# Altium PCB 核心板.PcbDoc (part 2 of 3)
Units mm, origin at the board's own origin, x right, y up, seen from the top; angles counter-clockwise.
Board outline 93.66 x 72.54 mm, 2 copper layers (Top Layer, Bottom Layer); 96 components, 149 nets, 537 pads, 213 vias.
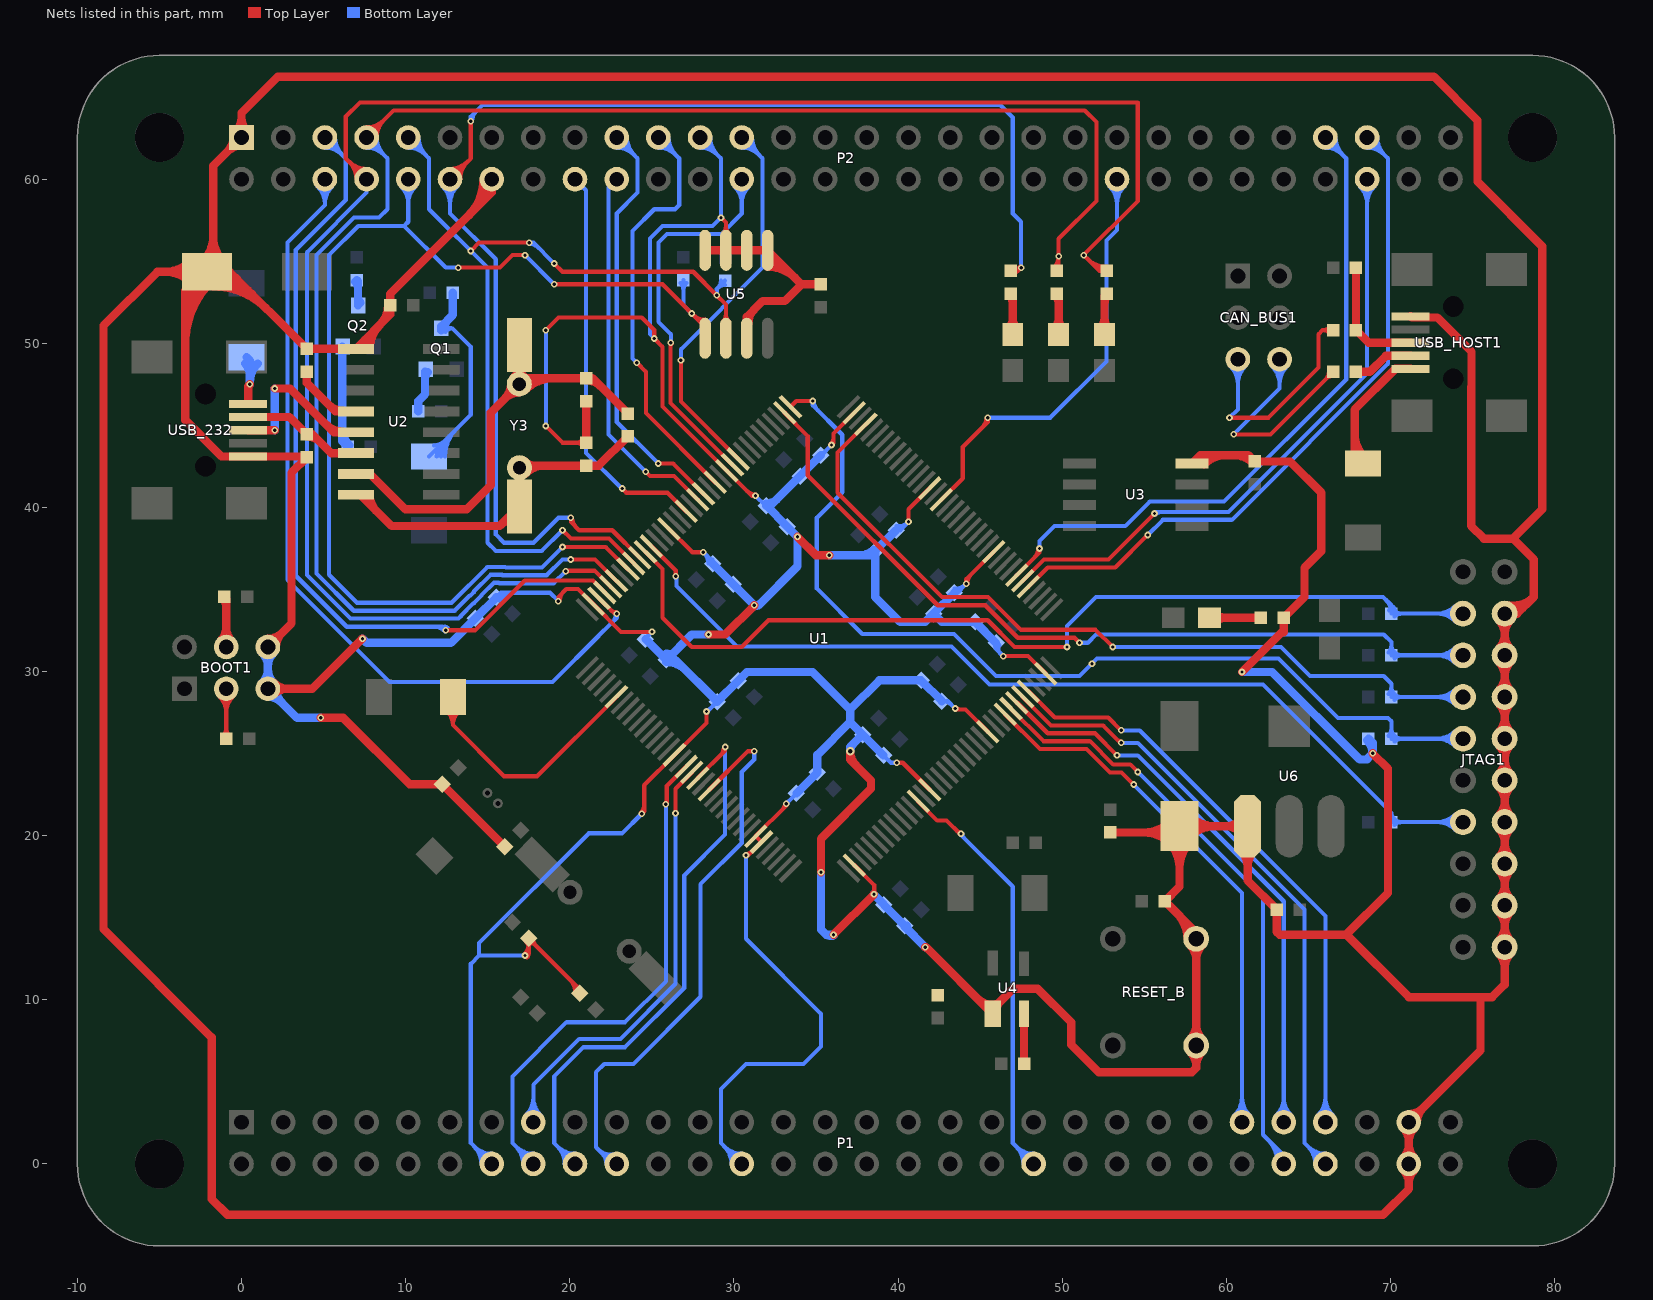
[diagram p2: the nets of this part, all layers, seen from the top]

## Via types
v1: diameter 0.406, hole 0.203, Top Layer to Bottom Layer, 212 vias
v2: diameter 0.508, hole 0.254, Top Layer to Bottom Layer, 1 vias

## Nets (pads, with @x,y where several pads share a name; then routed paths per layer and width w, separated by ;. In a path a pad name is that pad's centre, name@x,y a point inside that pad or via, vN(x,y) a via of type N, cw(c..) or ccw(c..) an arc to the next point about the centre after c; other vN are vias at no path point) (continued)
FSMC_D8: P1.49 U1.64 | length 36.7
  Top Layer w0.254: U1.64@46.531,27.392 48.65,25.273 51.486,25.273 52.909,23.851 53.619,23.851 v1(54.356,23.114)
  Bottom Layer w0.254: v1(54.356,23.114) 60.96,16.51 P1.49@60.96,2.54 ; P1.49@60.519,2.981 ccw(c59.456,4.044) 60.96,4.044 ccw(c62.464,4.044) P1.49@61.401,2.981 ; P1.49@60.699,2.801 ccw(c60.069,3.431) 60.96,3.431 ccw(c61.851,3.431) P1.49@61.221,2.801
FSMC_D9: P1.52 U1.65 | length 39.7
  Top Layer w0.254: U1.65@46.885,27.745 46.885,27.728 48.857,25.756 51.686,25.756 53.109,24.333 54.153,24.333 v1(54.61,23.876)
  Bottom Layer w0.254: v1(54.61,23.876) 62.23,16.256 62.23,1.779 63.5,0.509 P1.52@63.5,0 ; 62.51,1.499 cw(c61.012,0) P1.52@63.131,0 ; 62.944,1.065 cw(c61.879,0) P1.52@63.385,0
FSMC_D10: P1.51 U1.66 | length 38.5
  Top Layer w0.254: U1.66@47.238,28.099 47.262,28.099 49.123,26.238 51.994,26.238 v1(53.34,24.892)
  Bottom Layer w0.254: v1(53.34,24.892) 54.61,24.892 63.5,16.002 P1.51@63.5,2.54 ; P1.51@63.059,2.981 ccw(c61.996,4.044) 63.5,4.044 ccw(c65.004,4.044) P1.51@63.941,2.981 ; P1.51@63.239,2.801 ccw(c62.609,3.431) 63.5,3.431 ccw(c64.391,3.431) P1.51@63.761,2.801
FSMC_D11: P1.54 U1.67 | length 42.5
  Top Layer w0.254: U1.67@47.592,28.452 49.323,26.721 52.499,26.721 53.566,25.654 v1(53.594,25.654) ; 53.416,25.804 ccw(c53.594,25.982) v1@53.594,25.73
  Bottom Layer w0.254: v1(53.594,25.654) 54.61,25.654 64.77,15.494 64.77,1.27 P1.54@66.04,0 ; P1.54@65.417,0 ccw(c63.913,0) 64.976,1.064 ccw(c66.04,2.127) P1.54@66.04,0.623 ; P1.54@65.671,0 ccw(c64.78,0) 65.41,0.63 ccw(c66.04,1.26) P1.54@66.04,0.369
FSMC_D12: P1.53 U1.68 | length 40.1
  Top Layer w0.254: U1.68@47.945,28.806 49.548,27.203 52.807,27.203 v1(53.594,26.416)
  Bottom Layer w0.254: v1(53.594,26.416) 54.73,26.416 66.04,15.106 P1.53@66.04,2.54 ; P1.53@65.599,2.981 ccw(c64.536,4.044) 66.04,4.044 ccw(c67.544,4.044) P1.53@66.481,2.981 ; P1.53@65.779,2.801 ccw(c65.149,3.431) 66.04,3.431 ccw(c66.931,3.431) P1.53@66.301,2.801
FSMC_D13: P2.55 U1.77 | length 45.6
  Top Layer w0.254: U1.77@47.945,35.17 49.123,36.347 53.233,36.347 v1(55.208,38.322)
  Bottom Layer w0.254: v1(55.208,38.322) 55.213,38.322 56.134,39.243 60.338,39.243 69.85,48.755 69.85,61.27 P2.55@68.58,62.54 ; P2.55@68.58,61.917 cw(c68.58,60.413) 69.644,61.476 cw(c70.707,62.54) P2.55@69.203,62.54 ; P2.55@68.58,62.171 cw(c68.58,61.28) 69.21,61.91 cw(c69.84,62.54) P2.55@68.949,62.54
FSMC_D14: P2.56 U1.78 | length 42.2
  Top Layer w0.254: U1.78@47.592,35.523 48.898,36.83 52.832,36.83 v1(55.626,39.624)
  Bottom Layer w0.254: v1(55.626,39.624) 55.728,39.726 60.138,39.726 68.58,48.168 P2.56@68.58,60 ; v1@55.68,39.57 cw(c56.055,39.195) 56.055,39.726 ; P2.56@68.139,59.559 cw(c67.076,58.496) 68.58,58.496 cw(c70.084,58.496) P2.56@69.021,59.559 ; P2.56@68.319,59.739 cw(c67.689,59.109) 68.58,59.109 cw(c69.471,59.109) P2.56@68.841,59.739
FSMC_D15: P2.53 U1.79 | length 45.1
  Top Layer w0.254: U1.79@47.238,35.877 48.619,37.258 48.619,37.263 v1(48.619,37.493) ; 48.323,36.961 ccw(c47.791,37.493) v1@48.543,37.493
  Bottom Layer w0.254: v1(48.619,37.493) 48.619,37.475 48.615,37.475 48.615,37.947 49.53,38.862 53.848,38.862 55.34,40.354 59.865,40.354 67.31,47.8 67.31,61.27 P2.53@66.04,62.54 ; P2.53@66.04,61.917 cw(c66.04,60.413) 67.104,61.476 cw(c68.167,62.54) P2.53@66.663,62.54 ; P2.53@66.04,62.171 cw(c66.04,61.28) 66.67,61.91 cw(c67.3,62.54) P2.53@66.409,62.54
FSMC_INT3: P2.44 U1.92 | length 30.6
  Top Layer w0.254: U1.92@42.642,40.473 43.942,41.773 43.942,43.688 45.466,45.212 v1(45.466,45.466) ; 45.156,44.902 ccw(c44.593,45.466) v1@45.39,45.466
  Bottom Layer w0.254: v1(45.466,45.466) 49.276,45.466 52.705,48.895 52.705,56.261 53.34,56.896 P2.44@53.34,60 ; P2.44@52.899,59.559 cw(c51.836,58.496) 53.34,58.496 cw(c54.844,58.496) P2.44@53.781,59.559 ; P2.44@53.079,59.739 cw(c52.449,59.109) 53.34,59.109 cw(c54.231,59.109) P2.44@53.601,59.739
FSMC_INTR: P1.20 U1.22 | length 37.2
  Top Layer w0.254: U1.22@28.5,22.795 30.85,25.146 v1(31.242,25.146)
  Bottom Layer w0.254: 21.717,0.889 ccw(c22.47,1.642) P1.20@22.716,0.606 ; 21.976,0.63 cw(c21.346,0) P1.20@22.237,0 ; 22.039,0.567 ccw(c22.593,1.122) P1.20@22.775,0.359 ; P1.20@22.86,0 22.606,0 21.59,1.016 21.59,5.588 22.098,6.096 23.876,6.096 27.965,10.185 27.965,17.043 30.48,19.558 30.48,23.876 31.242,24.638 v1(31.242,25.146)
FSMC_NBL0: P2.5 U1.141 | length 55
  Top Layer w0.254: v1(12.446,32.512) 14.224,32.512 17.256,35.544 21.408,35.544 U1.141@22.136,34.816
  Bottom Layer w0.254: P2.5@5.08,61.917 cw(c5.08,60.413) 6.144,61.476 cw(c7.207,62.54) P2.5@5.703,62.54 ; P2.5@5.08,62.171 cw(c5.08,61.28) 5.71,61.91 cw(c6.34,62.54) P2.5@5.449,62.54 ; P2.5@5.08,62.54 6.35,61.27 6.35,58.73 3.302,55.682 3.302,35.836 6.41,32.728 12.23,32.728 v1(12.446,32.512) ; 11.741,32.728 cw(c11.741,31.807) v1@12.392,32.458 ; 12.354,32.728 cw(c12.354,32.42) v1@12.572,32.638
FSMC_NBL1: P2.6 U1.142 | length 56
  Top Layer w0.254: U1.142@21.782,34.463 22.717,33.528 v1(22.86,33.528) ; 22.486,33.759 ccw(c22.86,34.133) v1@22.86,33.604
  Bottom Layer w0.254: P2.6@4.639,59.559 cw(c3.576,58.496) 5.08,58.496 cw(c6.584,58.496) P2.6@5.521,59.559 ; P2.6@4.819,59.739 cw(c4.189,59.109) 5.08,59.109 cw(c5.971,59.109) P2.6@5.341,59.739 ; P2.6@5.08,60 5.08,58.42 2.794,56.134 2.794,35.588 9.02,29.362 18.948,29.362 21.768,32.182 21.768,32.202 22.5,32.934 22.52,32.934 22.86,33.274 v1(22.86,33.528) ; 22.647,33.061 ccw(c22.292,33.417) v1@22.785,33.513
FSMC_NE2: P2.19 U1.124 | length 29.2
  Top Layer w0.254: v1(25.4,42.672) 26.301,42.672 U1.124@28.146,40.827
  Bottom Layer w0.254: P2.19@22.86,61.917 cw(c22.86,60.413) 23.924,61.476 cw(c24.987,62.54) P2.19@23.483,62.54 ; P2.19@22.86,62.171 cw(c22.86,61.28) 23.49,61.91 cw(c24.12,62.54) P2.19@23.229,62.54 ; P2.19@22.86,62.54 24.13,61.27 24.13,59.182 22.86,57.912 22.86,45.212 v1(25.4,42.672)
FSMC_NE3: P2.20 U1.125 | length 22.8
  Top Layer w0.254: v1(24.638,42.164) 24.892,41.91 26.356,41.91 U1.125@27.793,40.473
  Bottom Layer w0.254: P2.20@22.86,60 22.352,59.492 22.352,44.45 v1(24.638,42.164)
FSMC_NE4: P2.18 U1.127 | length 24.7
  Top Layer w0.254: v1(23.19,41.148) 23.444,40.894 25.958,40.894 U1.127@27.086,39.766
  Bottom Layer w0.254: P2.18@20.32,60 20.998,59.322 20.998,43.315 23.165,41.148 v1(23.19,41.148) ; 23.017,41.296 ccw(c23.19,41.469) v1@23.19,41.224
FSMC_NIORD: P1.16 U1.18 | length 35.3
  Top Layer w0.254: v1@25.803,21.965 ccw(c25.551,22.217) 25.908,22.217 ; v1(25.857,21.911) 25.889,21.911 25.908,21.93 25.908,23.032 U1.18@27.086,24.21
  Bottom Layer w0.254: P1.16@17.157,0 ccw(c15.653,0) 16.716,1.064 ccw(c17.78,2.127) P1.16@17.78,0.623 ; P1.16@17.411,0 ccw(c16.52,0) 17.15,0.63 ccw(c17.78,1.26) P1.16@17.78,0.369 ; P1.16@17.78,0 16.51,1.27 16.51,5.334 19.812,8.636 23.368,8.636 25.857,11.125 v1(25.857,21.911)
FSMC_NIOS16: P1.40 U1.49 | length 29.7
  Top Layer w0.254: U1.49@41.228,22.088 42.386,20.93 42.951,20.93 43.764,20.117 v1(43.84,20.117) ; 43.58,20.301 ccw(c43.84,20.561) v1@43.84,20.193
  Bottom Layer w0.254: v1(43.84,20.117) 43.84,20.04 46.99,16.891 46.99,1.27 P1.40@48.26,0 ; v1@43.917,20.117 ccw(c44.285,20.117) 44.025,19.856 ; P1.40@47.637,0 ccw(c46.133,0) 47.196,1.064 ccw(c48.26,2.127) P1.40@48.26,0.623 ; P1.40@47.891,0 ccw(c47,0) 47.63,0.63 ccw(c48.26,1.26) P1.40@48.26,0.369
FSMC_NIOWR: P1.18 U1.20 | length 38.7
  Top Layer w0.254: U1.20@27.793,23.503 29.464,25.174 v1(29.464,25.4) ; 29.174,24.884 ccw(c28.658,25.4) v1@29.388,25.4
  Bottom Layer w0.254: P1.18@19.697,0 ccw(c18.193,0) 19.256,1.064 ccw(c20.32,2.127) P1.18@20.32,0.623 ; P1.18@19.951,0 ccw(c19.06,0) 19.69,0.63 ccw(c20.32,1.26) P1.18@20.32,0.369 ; P1.18@20.32,0 19.05,1.27 19.05,5.334 20.828,7.112 23.368,7.112 26.973,10.717 26.973,17.575 29.464,20.066 v1(29.464,25.4)
FSMC_NOE: P2.25 U1.118 | length 27.4
  Top Layer w0.254: v1(26.772,48.971) 26.772,46.444 U1.118@30.268,42.948
  Bottom Layer w0.254: v1(26.772,48.971) 26.772,49.632 31.75,54.61 31.75,61.27 P2.25@30.48,62.54 ; P2.25@30.48,61.917 cw(c30.48,60.413) 31.544,61.476 cw(c32.607,62.54) P2.25@31.103,62.54 ; P2.25@30.48,62.171 cw(c30.48,61.28) 31.11,61.91 cw(c31.74,62.54) P2.25@30.849,62.54
FSMC_NREG: P1.15 U1.19 | length 30.6
  Top Layer w0.254: v1(26.443,21.363) 26.443,22.86 U1.19@27.439,23.856
  Bottom Layer w0.254: P1.15@17.339,2.981 ccw(c16.276,4.044) 17.78,4.044 ccw(c19.284,4.044) P1.15@18.221,2.981 ; P1.15@17.519,2.801 ccw(c16.889,3.431) 17.78,3.431 ccw(c18.671,3.431) P1.15@18.041,2.801 ; P1.15@17.78,2.54 17.78,4.826 20.574,7.62 23.089,7.62 26.443,10.974 v1(26.443,21.363)
FSMC_NWAIT: P2.21 U1.122 | length 29.3
  Top Layer w0.254: v1(24.079,48.819) 24.638,48.26 24.638,45.749 U1.122@28.853,41.534
  Bottom Layer w0.254: v1(24.079,48.819) 23.825,49.073 23.825,56.845 25.146,58.166 26.416,58.166 26.67,58.42 26.67,61.27 P2.21@25.4,62.54 ; P2.21@25.4,61.917 cw(c25.4,60.413) 26.464,61.476 cw(c27.527,62.54) P2.21@26.023,62.54 ; P2.21@25.4,62.171 cw(c25.4,61.28) 26.03,61.91 cw(c26.66,62.54) P2.21@25.769,62.54
FSMC_NWE: P2.26 U1.119 | length 27.3
  Top Layer w0.254: 26.14,49.8 cw(c26.4,49.8) v1@26.216,49.984 ; v1(26.162,50.038) 26.14,50.016 26.14,46.369 U1.119@29.914,42.594
  Bottom Layer w0.254: v1(26.162,50.038) 26.162,50.546 25.4,51.308 25.4,56.134 25.933,56.667 29.235,56.667 30.48,57.912 P2.26@30.48,60 ; P2.26@30.039,59.559 cw(c28.976,58.496) 30.48,58.496 cw(c31.984,58.496) P2.26@30.921,59.559 ; P2.26@30.219,59.739 cw(c29.589,59.109) 30.48,59.109 cw(c31.371,59.109) P2.26@30.741,59.739
GND: BOOT1.5 BOOT1.6 C1.2 C2.2 C3.1 C4.2 C5.2 C6.1 C7.1 C8.2 C9.2 C10.2 C11.2 C12.1 C13.1 C14.1 C15.1 C16.1 C17.1 C18.1 C19.1 C20.1 C21.1 C22.1 C23.1 C24.1 C25.1 C26.1 C27.2 C28.2 C29.2 C30.2 C31.2 C32.2 C33.2 C34.2 C35.2 C36.1 C37.2 C38.2 C39.2 CT1.2 CT2.2 JTAG1.4 JTAG1.6 JTAG1.8 JTAG1.10 JTAG1.12 JTAG1.14 JTAG1.16 JTAG1.18 JTAG1.20 P1.14 P1.26 P1.57 P1.58 P2.1 P2.14 P2.23 R6.1 R11.2 R16.1 RESET_B.1 U1.16 U1.30 U1.31 U1.38 U1.51 U1.61 U1.71 U1.83 U1.94 U1.107 U1.120 U1.130 U1.143 U2.1 U3.4 U4.1 U5.1 U5.2 U5.3 U5.4 U5.7 U6.1 USB_232.5 USB_HOST1.5 | length 957.8
  Top Layer w0.254: v1@17.218,12.754 ccw(c16.543,13.429) C5.2@17.498,13.429 ; v1(17.272,12.7) 17.498,12.926 C5.2@17.498,13.744 20.602,10.64 C4.2@20.602,10.386 ccw(c19.989,10.386) 20.423,10.819 ; C5.2@17.318,13.565 cw(c16.885,13.131) 17.498,13.131 cw(c18.111,13.131) C5.2@17.677,13.565 ; v1@17.398,12.574 ccw(c17.156,12.816) 17.498,12.816 ; C5.2@17.498,13.49 cw(c17.498,12.877) 17.931,13.311 cw(c18.365,13.744) C5.2@17.752,13.744 ; v1(18.542,44.958) 19.558,43.942 C24.1@20.998,43.942 ; v1(18.542,50.8) 19.304,51.562 24.384,51.562 25.146,50.8 v1(25.146,50.292) 25.654,49.784 25.654,46.147 U1.120@29.56,42.241 31.097,40.705 v1(31.319,40.705) ; v1(19.304,34.29) 19.304,34.544 19.787,35.027 20.243,35.027 20.25,35.033 20.505,35.033 U1.143@21.429,34.109 23.12,32.418 v1(25.014,32.418) ; v1@19.38,34.29 cw(c20.177,34.29) 19.614,34.854 ; 19.989,11.253 cw(c19.122,10.386) C4.2@20.348,10.386 ; C24.1@20.818,43.762 ccw(c20.385,43.329) 20.385,43.942 ccw(c20.385,44.555) C24.1@20.818,44.122 ; v1@24.33,21.39 ccw(c23.832,21.888) 24.536,21.888 ; v1(24.384,21.336) 24.536,21.488 24.536,23.075 U1.16@26.378,24.917 28.33,26.868 v1(28.33,27.563) ; U1.130@26.025,38.705 27.46,37.27 v1(28.139,37.27) ; v1(29.21,57.658) 29.515,57.353 U5.3@29.515,55.663 ; U5.3@29.357,56.721 ccw(c28.976,57.101) 29.515,57.101 ccw(c30.053,57.101) U5.3@29.672,56.721 ; v1(30.734,18.796) 30.864,18.796 U1.31@31.682,19.613 U1.30@31.328,19.967 33.194,21.833 v1(33.194,21.937) ; v1@30.734,18.872 ccw(c30.734,19.371) U1.31@31.087,19.018 ; 30.809,40.992 ccw(c31.319,41.503) v1@31.319,40.781 ; 32.99,21.629 ccw(c32.681,21.937) v1@33.118,21.937 ; v1@35.891,43.852 ccw(c35.463,44.28) 36.068,44.28 ; v1(35.945,43.799) 36.068,43.922 36.068,44.506 U1.107@37.339,45.776 ; U1.38@37.316,18.199 U1.38@37.339,18.199 38.546,16.992 38.546,16.436 v1(38.531,16.42) ; v1@38.477,16.474 ccw(c38.31,16.641) 38.546,16.641 ; v1(39.924,24.443) 40.287,24.443 U1.51@41.935,22.795 ; v1(40.64,39.116) 40.64,39.885 U1.94@41.935,41.18 ; v1(43.48,27.745) 43.539,27.686 44.115,27.686 U1.61@45.47,26.331 ; v1@43.534,27.799 ccw(c43.807,28.071) 43.807,27.686 ; v1(44.15,35.339) 44.15,35.618 U1.83@45.824,37.291 ; v1@44.227,35.339 cw(c45.083,35.339) 44.477,35.945 ; v1(46.411,30.93) 46.431,30.949 47.923,30.949 U1.71@49.006,29.867 ; v1@46.465,30.876 cw(c46.642,30.699) 46.642,30.949
  Top Layer w0.508: -3.429,49.96 cw(c1.899,49.96) CT1.2@-1.868,53.727 ; -3.429,51.186 cw(c0.673,51.186) CT1.2@-2.228,54.087 ; -3.429,52.413 cw(c-0.554,52.413) CT1.2@-2.587,54.446 ; CT1.2@-3.126,53.727 ccw(c-4.643,52.21) -4.643,54.356 ccw(c-4.643,56.502) CT1.2@-3.126,54.985 ; CT1.2@-2.364,54.985 ccw(c-3.9,56.521) -1.727,56.521 ; CT1.2@-1.854,54.618 CT1.2@-2.116,54.356 ; CT1.2@-1.735,53.467 cw(c-1.735,48.868) 1.517,52.12 ; CT1.2@-1.735,53.975 cw(c-1.735,50.602) 0.65,52.987 ; CT1.2@-1.735,54.483 cw(c-1.735,52.337) -0.217,53.854 ; -1.727,56.483 ccw(c0.392,56.483) CT1.2@-1.106,54.985 ; P2.1@-0.496,62.54 cw(c-1.693,62.54) -0.847,61.693 cw(c0,60.847) P2.1@0,62.044 ; P2.1@-0.351,62.891 ccw(c-1.197,63.737) 0,63.737 ccw(c1.197,63.737) P2.1@0.351,62.891 ; BOOT1.5@1.608,28.956 4.318,28.956 v1(7.366,32.004) ; BOOT1.6@1.608,31.496 3.048,32.936 3.048,42.121 R11.2@3.98,43.053 3.929,43.104 USB_232.5@0.4,43.104 -1.219,43.104 -3.429,45.314 -3.429,53.213 CT1.2@-2.286,54.356 ; BOOT1.6@1.608,31.992 ccw(c1.608,33.189) 2.455,32.343 ccw(c3.301,31.496) BOOT1.6@2.104,31.496 ; BOOT1.5@1.959,28.605 cw(c2.805,27.759) 2.805,28.956 cw(c2.805,30.153) BOOT1.5@1.959,29.307 ; 3.55,43.104 cw(c3.55,42.623) R11.2@3.89,42.963 ; v1(4.826,27.178) 6.197,27.178 10.233,23.142 C1.2@12.22,23.142 C2.2@16.03,19.332 ; U2.1@7.306,49.657 cw(c8.122,49.657) 7.545,50.234 ; U2.1@7.814,49.657 cw(c9.856,49.657) 8.412,51.101 ; 8.437,51.126 ccw(c7.238,52.324) C3.1@8.933,52.324 ; 13.815,57.757 ccw(c11.572,60) P2.14@14.744,60 ; 14.682,58.624 ccw(c13.306,60) P2.14@15.252,60 ; P2.14@15.24,60 15.24,59.182 9.06,53.002 C3.1@9.06,52.324 9.06,51.749 U2.1@6.968,49.657 C10.2@3.98,49.657 -0.719,54.356 CT1.2@-2.116,54.356 ; C24.1@20.998,43.942 C25.1@20.998,46.482 ; U5.4@28.245,55.663 U5.3@29.515,55.663 U5.2@30.785,55.663 U5.1@32.055,55.663 34.124,53.594 ; v1(28.448,32.258) 29.464,32.258 v1(31.242,34.036) ; U5.7@30.785,50.306 30.785,51.613 31.75,52.578 33.108,52.578 34.124,53.594 ; U5.7@30.881,51.206 cw(c32.095,51.206) 31.236,52.064 ; U5.1@32.055,54.667 cw(c32.055,52.262) 33.755,53.963 ; U5.1@32.055,55.175 cw(c32.055,53.997) 32.888,54.83 ; v1(33.874,38.205) 34.995,37.084 v1(35.814,37.084) ; v1(35.306,17.78) 35.306,19.812 38.354,22.86 38.354,23.368 37.084,24.638 v2(37.084,25.146) ccw(c38.31,25.146) 37.443,24.279 ; C26.1@35.306,53.594 34.124,53.594 ; v1(36.068,13.97) 36.081,13.97 v1(38.531,16.42) ; v1(41.656,13.208) 41.708,13.208 U4.1@45.772,9.144 45.772,9.45 46.99,10.668 48.514,10.668 50.546,8.636 50.546,7.268 52.226,5.588 57.912,5.588 58.166,5.842 RESET_B.1@58.166,13.716 58.166,14.097 C27.2@56.261,16.002 57.15,16.891 CT2.2@57.15,20.574 ; 44.84,10.076 ccw(c45.772,11.009) 45.772,9.69 ccw(c45.772,10.27) U4.1@46.182,9.86 ; U4.1@46.026,9.436 cw(c46.672,9.436) U4.1@46.215,9.893 ; C37.2@52.916,20.193 56.769,20.193 CT2.2@57.15,20.574 ; CT2.2@56.521,20.822 cw(c55.004,22.339) 55.004,20.193 cw(c55.004,18.047) 56.521,19.564 cw(c55.004,18.047) 57.15,18.047 cw(c59.296,18.047) CT2.2@57.779,19.564 ; 56.986,15.277 cw(c55.425,13.716) RESET_B.1@57.633,13.716 ; CT2.2@57.779,19.945 cw(c59.292,18.432) 59.292,20.572 ; CT2.2@57.779,21.203 ccw(c59.3,22.724) 59.3,20.572 ; RESET_B.1@57.789,6.839 cw(c56.878,5.928) 58.166,5.928 cw(c59.454,5.928) RESET_B.1@58.543,6.839 ; RESET_B.1@57.789,7.593 ccw(c56.878,8.504) 58.166,8.504 ccw(c59.454,8.504) RESET_B.1@58.543,7.593 ; RESET_B.1@57.789,13.339 cw(c56.878,12.428) 58.166,12.428 cw(c59.454,12.428) RESET_B.1@58.543,13.339 ; U3.4@57.912,42.674 58.418,43.18 61.341,43.18 C11.2@61.593,42.928 ; U3.4@58.659,42.638 cw(c59.968,41.328) 59.968,43.18 ; 60.496,43.18 cw(c60.496,41.573) C11.2@61.632,42.709 ; U6.1@60.895,19.089 cw(c59.919,18.113) 61.299,18.113 cw(c62.679,18.113) U6.1@61.703,19.089 ; U6.1@60.895,20.168 ccw(c59.919,19.193) 59.919,20.572 ccw(c59.919,21.952) U6.1@60.895,20.976 ; v1(60.96,29.972) 63.373,32.385 63.5,32.385 R6.1@63.5,33.274 64.77,34.544 64.77,36.322 65.786,37.338 65.786,40.894 63.881,42.799 C11.2@61.722,42.799 ; v1(68.918,25.019) 69.85,24.087 69.85,16.51 67.31,13.97 ; P1.58@70.769,-0.351 cw(c69.923,-1.197) 71.12,-1.197 cw(c72.317,-1.197) P1.58@71.471,-0.351 ; P1.58@70.769,0.351 ccw(c69.923,1.197) 71.12,1.197 ccw(c72.317,1.197) P1.58@71.471,0.351 ; P1.57@70.769,2.189 cw(c69.923,1.343) 71.12,1.343 cw(c72.317,1.343) P1.57@71.471,2.189 ; P1.57@71.12,3.036 ccw(c71.12,4.233) 71.967,3.387 ccw(c72.813,2.54) P1.57@71.616,2.54 ; USB_HOST1.5@71.228,51.638 71.295,51.571 72.864,51.571 74.946,49.489 74.946,47.375 74.917,47.346 74.917,38.875 75.692,38.1 77.47,38.1 ; JTAG1.20@76.585,12.831 cw(c75.674,11.92) 76.962,11.92 cw(c78.25,11.92) JTAG1.20@77.339,12.831 ; JTAG1.20@76.585,13.585 ccw(c75.674,14.496) 76.962,14.496 ccw(c78.25,14.496) JTAG1.20@77.339,13.585 ; JTAG1.18@76.585,15.371 cw(c75.674,14.46) 76.962,14.46 cw(c78.25,14.46) JTAG1.18@77.339,15.371 ; JTAG1.18@76.585,16.125 ccw(c75.674,17.036) 76.962,17.036 ccw(c78.25,17.036) JTAG1.18@77.339,16.125 ; JTAG1.16@76.585,17.911 cw(c75.674,17) 76.962,17 cw(c78.25,17) JTAG1.16@77.339,17.911 ; JTAG1.16@76.585,18.665 ccw(c75.674,19.576) 76.962,19.576 ccw(c78.25,19.576) JTAG1.16@77.339,18.665 ; JTAG1.14@76.585,20.451 cw(c75.674,19.54) 76.962,19.54 cw(c78.25,19.54) JTAG1.14@77.339,20.451 ; JTAG1.14@76.585,21.205 ccw(c75.674,22.116) 76.962,22.116 ccw(c78.25,22.116) JTAG1.14@77.339,21.205 ; JTAG1.12@76.585,22.991 cw(c75.674,22.08) 76.962,22.08 cw(c78.25,22.08) JTAG1.12@77.339,22.991 ; JTAG1.12@76.585,23.745 ccw(c75.674,24.656) 76.962,24.656 ccw(c78.25,24.656) JTAG1.12@77.339,23.745 ; JTAG1.10@76.585,25.531 cw(c75.674,24.62) 76.962,24.62 cw(c78.25,24.62) JTAG1.10@77.339,25.531 ; JTAG1.10@76.585,26.285 ccw(c75.674,27.196) 76.962,27.196 ccw(c78.25,27.196) JTAG1.10@77.339,26.285 ; JTAG1.8@76.585,28.071 cw(c75.674,27.16) 76.962,27.16 cw(c78.25,27.16) JTAG1.8@77.339,28.071 ; JTAG1.8@76.585,28.825 ccw(c75.674,29.736) 76.962,29.736 ccw(c78.25,29.736) JTAG1.8@77.339,28.825 ; JTAG1.6@76.585,30.611 cw(c75.674,29.7) 76.962,29.7 cw(c78.25,29.7) JTAG1.6@77.339,30.611 ; JTAG1.6@76.585,31.365 ccw(c75.674,32.276) 76.962,32.276 ccw(c78.25,32.276) JTAG1.6@77.339,31.365 ; JTAG1.4@76.585,33.151 cw(c75.674,32.24) 76.962,32.24 cw(c78.25,32.24) JTAG1.4@77.339,33.151 ; JTAG1.4@76.967,33.553 ccw(c77.219,34.741) 78.078,33.882 ; JTAG1.4@77.073,34.05 ccw(c77.451,35.833) 78.74,34.544 ; CT1.2@-2.286,54.356 -5.131,54.356 -8.407,51.079 -8.407,14.3 -1.821,7.714 -1.821,-2.141 -0.864,-3.099 69.545,-3.099 71.12,-1.524 P1.58@71.12,0 P1.57@71.12,2.54 75.489,6.909 75.489,10.16 ; CT1.2@-2.286,54.356 CT1.2@-2.116,54.356 ; CT1.2@-2.116,54.356 -1.727,54.745 -1.727,60.813 P2.1@0,62.54 0,64.039 2.21,66.248 72.644,66.248 75.311,63.581 75.311,59.848 79.248,55.911 79.248,39.878 77.47,38.1 ; CT2.2@57.15,20.574 57.152,20.572 U6.1@61.299,20.572 61.299,17.271 C36.1@63.076,15.494 63.076,14.14 63.246,13.97 67.31,13.97 ; 67.31,13.97 71.12,10.16 75.489,10.16 ; 75.489,10.16 76.2,10.16 76.962,10.922 JTAG1.20@76.962,13.208 JTAG1.18@76.962,15.748 JTAG1.16@76.962,18.288 JTAG1.14@76.962,20.828 JTAG1.12@76.962,23.368 JTAG1.10@76.962,25.908 JTAG1.8@76.962,28.448 JTAG1.6@76.962,30.988 JTAG1.4@76.962,33.528 77.724,33.528 78.74,34.544 ; 77.47,38.1 78.74,36.83 78.74,34.544
  Bottom Layer w0.254: P1.14@14.617,0 ccw(c13.113,0) 14.176,1.064 ccw(c15.24,2.127) P1.14@15.24,0.623 ; P1.14@14.871,0 ccw(c13.98,0) 14.61,0.63 ccw(c15.24,1.26) P1.14@15.24,0.369 ; P1.14@15.24,0 13.97,1.27 13.97,12.192 14.478,12.7 ; C38.2@15.702,34.336 cw(c16.817,33.221) 16.817,34.798 ; 16.203,34.798 ccw(c16.203,33.835) C38.2@15.522,34.516 15.804,34.798 18.796,34.798 v1(19.304,34.29) ; v1(17.272,12.7) 14.478,12.7 ; v1(18.542,44.958) v1(18.542,50.8) ; v1(24.384,21.336) 23.19,20.142 21.158,20.142 14.478,13.462 14.478,12.7 ; C34.2@24.61,31.976 24.593,31.992 24.593,31.997 v1(25.014,32.418) ; v1(25.146,50.292) 25.146,50.32 24.892,50.574 24.892,56.388 25.654,57.15 28.702,57.15 v1(29.21,57.658) 29.21,61.27 P2.23@27.94,62.54 ; P2.23@27.94,61.917 cw(c27.94,60.413) 29.004,61.476 cw(c30.067,62.54) P2.23@28.563,62.54 ; P2.23@27.94,62.171 cw(c27.94,61.28) 28.57,61.91 cw(c29.2,62.54) P2.23@28.309,62.54 ; v1(28.139,37.27) 28.702,36.708 C6.1@28.702,36.576 ; v1@28.175,37.234 cw(c27.517,36.576) C6.1@28.448,36.576 ; v1(28.33,27.563) 28.351,27.542 28.36,27.542 C32.2@28.984,28.166 ; v1@28.33,27.639 ccw(c28.33,27.949) 28.548,27.73 ; 28.493,36.917 ccw(c28.702,37.126) C6.1@28.702,36.83 ; P1.26@29.857,0 ccw(c28.353,0) 29.416,1.064 ccw(c30.48,2.127) P1.26@30.48,0.623 ; P1.26@30.111,0 ccw(c29.22,0) 29.85,0.63 ccw(c30.48,1.26) P1.26@30.48,0.369 ; P1.26@30.48,0 29.21,1.27 29.21,4.572 30.734,6.096 34.239,6.096 35.306,7.163 35.306,9.144 30.734,13.716 v1(30.734,18.796) ; v1(31.319,40.705) 31.92,40.104 C8.2@31.976,40.104 ; v1@33.194,21.961 C30.2@33.81,22.578 ; v1@33.27,21.937 cw(c33.513,21.937) 33.341,22.109 ; C12.1@35.306,43.18 35.326,43.18 v1(35.945,43.799) ; C22.1@39.116,24.892 39.565,24.443 v1(39.924,24.443) ; C14.1@39.907,38.86 ccw(c40.009,39.747) v1(40.64,39.116) 40.132,38.608 C14.1@39.878,38.608 ccw(c39.932,39.08) C14.1@40.268,38.744 ; 43.256,27.97 ccw(c42.711,27.425) C20.1@42.672,28.194 43.031,28.194 v1(43.48,27.745) ; C16.1@43.434,34.798 43.609,34.798 v1(44.15,35.339) cw(c43.457,36.032) C16.1@43.439,35.052 ; C18.1@46.008,31.333 cw(c46.237,31.562) C18.1@45.974,31.75 45.974,31.367 v1(46.411,30.93) ; C18.1@46.181,31.602 ccw(c46.484,31.385) 46.22,31.121
  Bottom Layer w0.508: BOOT1.5@1.257,29.307 ccw(c0.411,30.153) 1.608,30.153 ccw(c2.805,30.153) BOOT1.5@1.959,29.307 ; BOOT1.6@1.257,31.145 cw(c0.411,30.299) 1.608,30.299 cw(c2.805,30.299) BOOT1.6@1.959,31.145 ; BOOT1.5@1.608,28.46 cw(c1.608,27.263) 2.455,28.109 cw(c3.301,28.956) BOOT1.5@2.104,28.956 ; BOOT1.6@1.608,31.496 BOOT1.5@1.608,28.956 3.386,27.178 v1(4.826,27.178) ; v1@7.33,31.968 ccw(c7.857,32.495) 7.857,31.75 ; v1(7.366,32.004) 7.62,31.75 12.756,31.75 C39.2@14.252,33.246 C38.2@15.522,34.516 ; C34.2@24.61,31.976 C35.2@25.88,30.706 ; C35.2@25.88,30.579 cw(c25.88,28.91) 27.06,30.09 ; C35.2@25.88,31.087 cw(c25.88,30.644) 26.193,30.957 ; v1(28.448,32.258) 27.432,32.258 C35.2@25.88,30.706 ; C6.1@28.702,36.576 C7.1@29.972,35.306 v1(31.242,34.036) 31.496,34.036 33.874,36.414 v1(33.874,38.205) C9.2@33.246,38.834 ; v1@31.242,33.985 ccw(c31.242,34.476) 31.589,34.129 ; C8.2@31.976,40.231 ccw(c31.976,41.151) 32.626,40.5 ; C9.2@33.246,38.834 C8.2@31.976,40.104 32.23,40.104 C13.1@34.036,41.91 C12.1@35.306,43.18 ; C30.2@33.81,22.578 C31.2@35.08,23.848 35.08,24.92 37.084,26.924 ; v1(35.306,17.78) 35.306,14.275 35.611,13.97 v1(36.068,13.97) ; 35.535,14.046 ccw(c35.908,14.42) v1@36.085,13.922 ; v1(35.814,37.084) 38.354,37.084 C15.1@38.608,37.338 ; 37.264,25.58 ccw(c37.697,25.146) v2(37.084,25.146) 37.084,25.4 C23.1@37.846,26.162 ; 37.688,37.084 ccw(c37.688,38.258) C15.1@38.518,37.428 ; v1(38.531,16.42) 39.144,15.807 C28.2@39.144,15.776 C29.2@40.414,14.506 40.414,14.45 v1(41.656,13.208) ; C22.1@39.116,24.892 C23.1@37.846,26.162 ; C14.1@39.878,38.608 C15.1@38.608,37.338 ; C29.2@40.541,14.506 ccw(c40.984,14.506) 40.671,14.193 ; C20.1@42.672,28.194 C21.1@41.402,29.464 38.862,29.464 37.084,27.686 ; C16.1@43.434,34.798 C17.1@42.164,33.528 ; C18.1@45.974,31.75 C19.1@44.704,33.02 42.672,33.02 C17.1@42.164,33.528 ; v1(60.96,29.972) 62.798,29.972 68.132,24.638 68.58,24.638 68.58,24.681 v1(68.918,25.019) 68.918,25.654 R16.1@68.664,25.908 ; R16.1@68.574,25.818 cw(c67.744,24.988) v1@68.918,24.988 ; C35.2@25.88,30.706 26.444,30.706 C32.2@28.984,28.166 C33.2@30.254,29.436 30.79,29.972 34.798,29.972 37.084,27.686 ; 37.084,26.924 C23.1@37.846,26.162 ; 37.084,26.924 37.084,27.686 ; C15.1@38.608,37.338 38.608,34.544 40.132,33.02 41.656,33.02 C17.1@42.164,33.528
I2C1_SCL: P2.9 R22.1 U1.136 U5.6 | length 63.9
  Top Layer w0.254: v1(13.97,55.626) 14.478,56.134 v1(17.526,56.134) ; v1(19.05,54.864) 19.558,54.356 27.521,54.356 v1(28.956,52.921) 29.515,52.362 U5.6@29.515,50.306 ; v1(19.558,38.608) 20.066,38.1 22.388,38.1 U1.136@23.904,36.584 ; U5.6@29.357,51.363 ccw(c28.976,51.744) 29.515,51.744 ccw(c30.053,51.744) U5.6@29.672,51.363
  Bottom Layer w0.254: P2.9@10.16,61.917 cw(c10.16,60.413) 11.224,61.476 cw(c12.287,62.54) P2.9@10.783,62.54 ; P2.9@10.16,62.171 cw(c10.16,61.28) 10.79,61.91 cw(c11.42,62.54) P2.9@10.529,62.54 ; P2.9@10.16,62.54 11.43,61.27 11.43,58.166 14.986,54.61 14.986,37.846 15.494,37.338 18.288,37.338 v1(19.558,38.608) ; v1@17.526,56.058 cw(c17.526,55.261) 18.09,55.824 ; v1(17.526,56.134) 17.78,56.134 v1(19.05,54.864) ; v1(28.956,52.921) 28.956,53.302 R22.1@29.464,53.81 ; R22.1@29.21,53.81 cw(c28.597,53.81) 29.03,53.376 cw(c29.464,52.943) R22.1@29.464,53.556
I2C1_SDA: P2.10 R17.1 U1.137 U5.5 | length 78.6
  Top Layer w0.254: v1(13.208,54.61) 15.748,54.61 16.51,55.372 v1(17.272,55.372) ; v1(19.05,53.594) 25.654,53.594 v1(27.432,51.816) 28.245,51.003 U5.5@28.245,50.306 ; v1(19.558,37.592) 22.189,37.592 U1.137@23.55,36.23 ; v1@27.533,51.715 ccw(c28.224,52.405) U5.5@28.241,51.429
  Bottom Layer w0.254: P2.10@9.719,59.559 cw(c8.656,58.496) 10.16,58.496 cw(c11.664,58.496) P2.10@10.601,59.559 ; P2.10@9.899,59.739 cw(c9.269,59.109) 10.16,59.109 cw(c11.051,59.109) P2.10@10.421,59.739 ; P2.10@10.16,60 10.16,57.404 9.906,57.15 ; v1(13.208,54.61) 12.446,54.61 9.906,57.15 ; v1(17.272,55.372) v1(19.05,53.594) ; v1(19.558,37.592) 18.313,36.347 16.098,36.347 16.069,36.375 14.975,36.375 12.788,34.188 7.04,34.188 5.334,35.895 5.334,55.372 7.112,57.15 9.906,57.15 ; R17.1@26.744,53.668 cw(c26.311,53.235) 26.924,53.235 cw(c27.537,53.235) R17.1@27.104,53.668 ; R17.1@26.924,53.848 26.924,52.324 v1(27.432,51.816)
JTCK: JTAG1.9 R16.2 U1.109 | length 65.6
  Top Layer w0.254: U1.109@33.45,46.13 33.802,46.482 v1(34.798,46.482)
  Bottom Layer w0.254: v1(34.798,46.482) 34.798,46.228 36.601,44.425 36.601,40.919 35.052,39.37 35.052,35.052 37.818,32.286 43.406,32.286 45.974,29.718 51.054,29.718 52.127,30.791 63.189,30.791 66.802,27.178 69.85,27.178 70.061,26.967 R16.2@70.061,25.908 JTAG1.9@74.422,25.908 ; v1@34.874,46.482 ccw(c35.671,46.482) 35.108,45.918 ; R16.2@69.881,26.088 ccw(c69.448,26.521) 70.061,26.521 ccw(c70.674,26.521) 70.241,26.088 ccw(c70.674,26.521) 70.674,25.908 ccw(c70.674,25.295) R16.2@70.241,25.728 ; JTAG1.9@73.955,25.441 ccw(c72.828,24.314) 72.828,25.908 ccw(c72.828,27.502) JTAG1.9@73.955,26.375 ; JTAG1.9@74.135,25.621 ccw(c73.441,24.927) 73.441,25.908 ccw(c73.441,26.889) JTAG1.9@74.135,26.195
  other v1: 51.816,30.48
JTDI: JTAG1.5 R14.2 U1.110 | length 55.7
  Top Layer w0.254: U1.110@33.096,45.776 33.096,45.752 34.496,44.352 34.496,41.958 42.418,34.036 45.317,34.036 47.295,32.058 50.746,32.058 v1(51.054,31.75)
  Bottom Layer w0.254: v1(51.054,31.75) 51.562,31.75 52.07,32.258 69.596,32.258 70.061,31.793 R14.2@70.061,30.988 JTAG1.5@74.422,30.988 ; R14.2@69.881,31.168 ccw(c69.448,31.601) 70.061,31.601 ccw(c70.674,31.601) 70.241,31.168 ccw(c70.674,31.601) 70.674,30.988 ccw(c70.674,30.375) R14.2@70.241,30.808 ; JTAG1.5@73.955,30.521 ccw(c72.828,29.394) 72.828,30.988 ccw(c72.828,32.582) JTAG1.5@73.955,31.455 ; JTAG1.5@74.135,30.701 ccw(c73.441,30.007) 73.441,30.988 ccw(c73.441,31.969) JTAG1.5@74.135,31.275
JTDO: JTAG1.13 R23.2 U1.133 | length 63.4
  Top Layer w0.254: U1.133@24.964,37.645 26.457,36.152 v1(26.457,35.814)
  Bottom Layer w0.254: v1@26.403,35.76 cw(c26.15,35.507) 26.508,35.507 ; v1(26.457,35.814) 26.488,35.814 26.508,35.794 26.508,35.214 30.201,31.521 43.263,31.521 45.574,29.21 62.23,29.21 70.061,21.379 ; R23.2@69.896,21.021 ccw(c69.59,21.379) 70.061,21.379 ; R23.2@70.226,21.021 cw(c70.532,21.379) 70.061,21.379 ; R23.2@70.241,20.648 cw(c70.674,20.215) 70.674,20.828 cw(c70.674,21.441) R23.2@70.241,21.008 ; JTAG1.13@73.955,20.361 ccw(c72.828,19.234) 72.828,20.828 ccw(c72.828,22.422) JTAG1.13@73.955,21.295 ; JTAG1.13@74.135,20.541 ccw(c73.441,19.847) 73.441,20.828 ccw(c73.441,21.809) JTAG1.13@74.135,21.115 ; JTAG1.13@74.422,20.828 R23.2@70.061,20.828 70.061,21.379
JTMS: JTAG1.7 R15.2 U1.105 | length 54.6
  Top Layer w0.254: U1.105@38.046,45.069 36.322,43.346 36.322,40.894 42.672,34.544 45.491,34.544 47.495,32.541 52.041,32.541 v1(53.086,31.496)
  Bottom Layer w0.254: v1(53.086,31.496) 63.325,31.496 65.103,29.718 69.596,29.718 70.061,29.253 R15.2@70.061,28.448 JTAG1.7@74.422,28.448 ; R15.2@69.881,28.628 ccw(c69.448,29.061) 70.061,29.061 ccw(c70.674,29.061) 70.241,28.628 ccw(c70.674,29.061) 70.674,28.448 ccw(c70.674,27.835) R15.2@70.241,28.268 ; JTAG1.7@73.955,27.981 ccw(c72.828,26.854) 72.828,28.448 ccw(c72.828,30.042) JTAG1.7@73.955,28.915 ; JTAG1.7@74.135,28.161 ccw(c73.441,27.467) 73.441,28.448 ccw(c73.441,29.429) JTAG1.7@74.135,28.735
JTRST: JTAG1.3 R13.2 U1.134 | length 65.2
  Top Layer w0.254: U1.134@24.611,37.291 25.654,36.248 25.654,33.274 27.432,31.496 30.48,31.496 32.106,33.122 45.466,33.122 47.092,31.496 v1(50.292,31.496)
  Bottom Layer w0.254: v1(50.292,31.496) 50.292,32.766 52.07,34.544 69.553,34.544 70.061,34.036 ; 69.72,34.377 cw(c68.896,33.553) R13.2@70.061,33.528 ; R13.2@69.909,33.731 ccw(c69.68,34.036) 70.061,34.036 ; 70.141,33.956 cw(c69.72,33.535) R13.2@70.315,33.523 ; R13.2@70.213,33.731 cw(c70.442,34.036) 70.061,34.036 ; R13.2@70.241,33.348 cw(c70.674,32.915) 70.674,33.528 cw(c70.674,34.141) R13.2@70.241,33.708 ; JTAG1.3@73.955,33.061 ccw(c72.828,31.934) 72.828,33.528 ccw(c72.828,35.122) JTAG1.3@73.955,33.995 ; JTAG1.3@74.135,33.241 ccw(c73.441,32.547) 73.441,33.528 ccw(c73.441,34.509) JTAG1.3@74.135,33.815 ; JTAG1.3@74.422,33.528 R13.2@70.061,33.528 ; R13.2@70.061,33.528 70.061,34.036
LED0: P2.7 R4.1 U1.139 | length 114.7
  Top Layer w0.254: P2.7@7.62,62.54 9.271,64.191 51.379,64.191 52.092,63.478 52.092,58.674 49.784,56.366 v1(49.784,55.296) ; P2.7@7.62,62.909 ccw(c7.62,63.8) 8.25,63.17 ccw(c8.88,62.54) P2.7@7.989,62.54 ; P2.7@7.62,63.163 ccw(c7.62,64.667) 8.684,63.604 ccw(c9.747,62.54) P2.7@8.243,62.54 ; v1(20.066,36.83) 21.536,36.83 U1.139@22.843,35.523 ; R4.1@49.482,54.591 ccw(c48.81,55.296) v1(49.784,55.296) ; R4.1@49.657,54.407 49.682,54.407 49.784,54.508 v1(49.784,55.296)
  Bottom Layer w0.254: P2.7@7.62,61.917 cw(c7.62,60.413) 8.684,61.476 cw(c9.747,62.54) P2.7@8.243,62.54 ; P2.7@7.62,62.171 cw(c7.62,61.28) 8.25,61.91 cw(c8.88,62.54) P2.7@7.989,62.54 ; P2.7@7.62,62.54 8.89,61.27 8.89,58.166 8.382,57.658 6.858,57.658 4.572,55.372 4.572,35.974 6.841,33.706 12.988,33.706 13.905,34.623 13.945,34.623 14.145,34.823 14.145,34.863 15.175,35.893 15.869,35.893 15.898,35.864 18.592,35.864 19.558,36.83 v1(20.066,36.83)
LED1: P2.8 R5.1 U1.140 | length 118.9
  Top Layer w0.254: P2.8@6.997,60 ccw(c5.493,60) 6.556,61.064 ccw(c7.62,62.127) P2.8@7.62,60.623 ; P2.8@7.251,60 ccw(c6.36,60) 6.99,60.63 ccw(c7.62,61.26) P2.8@7.62,60.369 ; P2.8@7.62,60 6.35,61.27 6.35,63.81 7.214,64.674 54.61,64.674 54.61,58.674 v1(51.308,55.372) 52.273,54.407 ; v1(19.761,36.119) 19.787,36.144 21.515,36.144 U1.140@22.489,35.17 ; v1@19.815,36.065 cw(c20.006,35.874) 20.006,36.144 ; 51.534,55.146 ccw(c52.705,56.316) R5.1@52.705,54.661 ; 51.968,54.712 ccw(c52.705,55.449) R5.1@52.705,54.407 52.273,54.407 ; R5.1@52.483,54.283 ccw(c52.273,54.167) 52.273,54.407 ; R5.1@52.483,54.53 cw(c52.273,54.647) 52.273,54.407
  Bottom Layer w0.254: P2.8@7.62,60 7.62,59.182 3.98,55.542 3.98,35.884 6.641,33.223 13.228,33.223 13.358,33.353 13.358,33.393 14.105,34.14 14.145,34.14 14.628,34.623 14.628,34.663 15.375,35.41 15.669,35.41 15.698,35.382 19.024,35.382 v1(19.761,36.119)
LED2: P2.12 R7.1 U1.135 | length 92.6
  Top Layer w0.254: P2.12@12.7,60 13.97,61.27 v1(13.97,63.531) ; P2.12@12.7,60.369 ccw(c12.7,61.26) 13.33,60.63 ccw(c13.96,60) P2.12@13.069,60 ; P2.12@12.7,60.623 ccw(c12.7,62.127) 13.764,61.064 ccw(c14.827,60) P2.12@13.323,60 ; v1(20.066,39.37) 20.066,39.116 20.574,38.608 22.587,38.608 U1.135@24.257,36.938 ; v1@20.142,39.37 ccw(c20.939,39.37) 20.376,38.806 ; R7.1@47.032,54.596 ccw(c47.258,54.85) v1(47.498,54.61) 47.295,54.407 ; R7.1@47.085,54.283 cw(c47.295,54.167) 47.295,54.407 ; R7.1@47.085,54.53 ccw(c47.295,54.647) 47.295,54.407 ; 47.308,54.42 cw(c47.079,54.649) R7.1@46.863,54.407 ; v1@47.442,54.661 cw(c46.863,55.192) R7.1@46.863,54.407 ; R7.1@46.863,54.407 47.295,54.407
  Bottom Layer w0.254: P2.12@12.259,59.559 cw(c11.196,58.496) 12.7,58.496 cw(c14.204,58.496) P2.12@13.141,59.559 ; P2.12@12.439,59.739 cw(c11.809,59.109) 12.7,59.109 cw(c13.591,59.109) P2.12@12.961,59.739 ; P2.12@12.7,60 12.7,57.912 15.494,55.118 15.494,38.354 16.002,37.846 17.78,37.846 19.304,39.37 v1(20.066,39.37) ; v1(13.97,63.531) 13.97,63.81 14.676,64.516 46.228,64.516 46.99,63.754 46.99,57.912 47.498,57.404 v1(47.498,54.61) ; v1@14.046,63.531 cw(c14.905,63.531) 14.298,64.138
NetBOOT1_3: BOOT1.3 R20.1 | length 7.8
  Top Layer w0.254: BOOT1.3@-1.373,28.515 cw(c-2.436,27.452) -0.932,27.452 cw(c0.572,27.452) BOOT1.3@-0.492,28.515 ; BOOT1.3@-1.193,28.695 cw(c-1.823,28.065) -0.932,28.065 cw(c-0.041,28.065) BOOT1.3@-0.671,28.695 ; R20.1@-1.112,26.088 ccw(c-1.545,26.521) -0.932,26.521 ccw(c-0.319,26.521) R20.1@-0.752,26.088 ; R20.1@-0.932,25.908 BOOT1.3@-0.932,28.956
NetBOOT1_4: BOOT1.4 R21.2 | length 5.6
  Top Layer w0.508: BOOT1.4@-1.283,31.847 ccw(c-2.129,32.693) -0.932,32.693 ccw(c0.265,32.693) BOOT1.4@-0.581,31.847 ; R21.2@-1.149,34.454 cw(c-1.672,33.931) -0.932,33.931 ; R21.2@-1.059,34.544 -0.932,34.417 BOOT1.4@-0.932,31.496
NetC10_1: C10.1 U2.4 | length 5.3
  Top Layer w0.508: C10.1@3.98,48.26 3.98,47.582 5.715,45.847 U2.4@6.968,45.847 ; 5.316,46.246 ccw(c6.168,47.098) U2.4@6.168,45.893
NetC24_2: C24.2 R10.2 U2.8 Y3.1 | length 23
  Top Layer w0.508: U2.8@6.968,40.767 7.239,40.767 9.144,38.862 15.731,38.862 Y3.1@16.934,40.065 ; U2.8@7.306,40.767 ccw(c7.468,40.767) U2.8@7.353,40.653 ; U2.8@7.814,40.767 ccw(c9.202,40.767) 8.221,39.785 ; 15.819,38.95 cw(c16.529,38.24) Y3.1@16.922,39.164 ; Y3.1@16.934,42.418 17.061,42.545 C24.2@20.998,42.545 21.76,42.545 R10.2@23.538,44.323 ; Y3.1@17.293,42.059 cw(c18.467,40.885) 18.467,42.545 ; Y3.1@17.293,42.777 ccw(c17.854,43.338) 17.854,42.545
NetC25_2: C25.2 R10.1 U2.7 Y3.2 | length 36.3
  Top Layer w0.508: U2.7@6.968,42.037 7.827,42.037 9.986,39.878 13.716,39.878 15.194,41.356 15.194,45.78 Y3.2@16.923,47.509 ; Y3.2@16.415,47.509 cw(c15.189,47.509) 16.056,46.642 cw(c16.923,45.775) Y3.2@16.923,47.001 ; Y3.2@16.564,47.868 ccw(c15.697,48.735) 16.923,48.735 ccw(c18.15,48.735) Y3.2@17.282,47.868 ; Y3.2@16.563,48.653 cw(c15.693,47.783) Y3.2@16.923,47.783 ; Y3.2@16.923,47.788 cw(c18.146,47.788) Y3.2@17.281,48.653 ; Y3.2@16.922,49.901 16.923,49.9 Y3.2@16.923,47.509 ; Y3.2@17.282,47.15 cw(c19.043,45.389) 19.043,47.879 ; 17.816,47.879 ccw(c17.816,46.616) Y3.2@16.923,47.509 ; C25.2@20.998,47.752 cw(c20.998,46.526) 21.865,47.393 ; R10.1@23.538,45.72 21.379,47.879 17.293,47.879 Y3.2@16.923,47.509
NetCAN_BUS1_5: CAN_BUS1.5 R24.2 | length 18.2
  Top Layer w0.254: v1(60.198,45.466) 62.568,45.466 65.616,48.514 65.616,50.546 65.87,50.8 R24.2@66.505,50.8 ; R24.2@66.325,50.62 ccw(c65.892,50.187) 65.892,50.8 ccw(c65.892,51.413) R24.2@66.325,50.98
  Bottom Layer w0.254: v1(60.198,45.466) 60.706,45.974 CAN_BUS1.5@60.706,49.022 ; CAN_BUS1.5@60.265,48.581 cw(c59.202,47.518) 60.706,47.518 cw(c62.21,47.518) CAN_BUS1.5@61.147,48.581 ; CAN_BUS1.5@60.445,48.761 cw(c59.815,48.131) 60.706,48.131 cw(c61.597,48.131) CAN_BUS1.5@60.967,48.761
NetCAN_BUS1_6: CAN_BUS1.6 R25.2 | length 18.1
  Top Layer w0.254: v1(60.452,44.45) 62.695,44.45 R25.2@66.505,48.26 ; R25.2@66.251,48.26 cw(c65.638,48.26) 66.071,47.826 cw(c66.505,47.393) R25.2@66.505,48.006
  Bottom Layer w0.254: v1(60.452,44.45) 63.246,47.244 CAN_BUS1.6@63.246,49.022 ; CAN_BUS1.6@62.805,48.581 cw(c61.742,47.518) 63.246,47.518 cw(c64.75,47.518) CAN_BUS1.6@63.687,48.581 ; CAN_BUS1.6@62.985,48.761 cw(c62.355,48.131) 63.246,48.131 cw(c64.137,48.131) CAN_BUS1.6@63.507,48.761
NetD1_2: D1.2 U1.6 | length 18.2
  Top Layer w0.254: D1.2@12.46,27.624 cw(c11.75,26.742) 12.882,26.742 ; D1.2@12.619,27.822 cw(c12.177,27.273) 12.882,27.273 cw(c13.587,27.273) D1.2@13.145,27.822 ; D1.2@12.882,28.448 12.882,26.742 ; D1.2@13.304,27.624 ccw(c14.014,26.742) 12.882,26.742 ; U1.6@22.843,28.452 18.013,23.622 16.002,23.622 12.882,26.742
NetD2_2: D2.2 Q1.3 R2.1 | length 18.9
  Bottom Layer w0.254: D2.2@11.43,43.108 13.97,45.648 13.97,49.784 12.847,50.907 ; D2.2@11.73,43.781 ccw(c11.73,44.681) 12.367,44.045 ; D2.2@11.895,43.108 cw(c13.018,43.108) D2.2@12.224,43.902 ; D2.2@12.149,43.108 cw(c13.885,43.108) 12.657,44.335 ; Q1.3@12.168,50.907 12.172,50.907 12.847,50.907 ; D2.2@12.403,43.108 cw(c14.752,43.108) 13.091,44.769 ; Q1.3@12.419,50.703 cw(c12.847,50.355) 12.847,50.907 ; Q1.3@12.419,51.111 ccw(c12.847,51.459) 12.847,50.907
  Bottom Layer w0.508: Q1.3@12.172,50.78 12.172,50.907 12.172,51.034 12.87,51.732 R2.1@12.87,53.086 ; Q1.3@12.364,50.932 cw(c13.074,50.932) 12.572,51.434
NetD3_1: D3.1 USB_232.1 | length 5.1
  Top Layer w0.508: USB_232.1@0.4,46.304 0.4,47.39 v1(0.508,47.498)
  Bottom Layer w0.508: D3.1@0.214,48.768 cw(c-0.496,48.058) 0.508,48.058 ; D3.1@0.3,49.154 0.508,48.946 v1(0.508,47.498) ; v1@0.508,47.614 cw(c2.14,47.614) D3.1@0.986,48.768
NetD4_1: D4.1 USB_HOST1.1 | length 9.8
  Top Layer w0.508: D4.1@67.64,43.058 ccw(c67.21,43.488) 67.818,43.488 ; 67.818,44.492 ccw(c69.846,44.492) D4.1@68.412,43.058 ; D4.1@68.326,42.926 67.818,43.434 67.818,45.96 70.296,48.438 USB_HOST1.1@71.228,48.438
NetLED1_2: LED1.2 R5.2 | length 4.5
  Top Layer w0.508: LED1.2@52.309,50.88 ccw(c51.658,51.531) 52.578,51.531 ccw(c53.498,51.531) LED1.2@52.847,50.88 ; LED1.2@52.578,50.546 52.578,52.883 R5.2@52.705,53.01 ; 52.578,52.397 cw(c53.318,52.397) R5.2@52.795,52.92
NetLED2_2: LED2.2 R4.2 | length 4.5
  Top Layer w0.508: LED2.2@49.515,50.88 ccw(c48.864,51.531) 49.784,51.531 ccw(c50.704,51.531) LED2.2@50.053,50.88 ; R4.2@49.567,52.92 cw(c49.044,52.397) 49.784,52.397 ; R4.2@49.657,53.01 49.784,52.883 LED2.2@49.784,50.546
NetLED3_2: LED3.2 R7.2 | length 4.5
  Top Layer w0.508: LED3.2@46.721,50.88 ccw(c46.07,51.531) 46.99,51.531 ccw(c47.91,51.531) LED3.2@47.259,50.88 ; R7.2@46.773,52.92 cw(c46.25,52.397) 46.99,52.397 ; R7.2@46.863,53.01 46.99,52.883 LED3.2@46.99,50.546
NetPOWER1_2: POWER1.2 R6.2 | length 4.6
  Top Layer w0.508: POWER1.2@58.979,33.274 R6.2@62.103,33.274 ; POWER1.2@59.313,33.005 cw(c59.964,32.354) 59.964,33.274 cw(c59.964,34.194) POWER1.2@59.313,33.543
NetQ1_2: Q1.2 R3.2 | length 3.1
  Bottom Layer w0.508: R3.2@10.771,45.847 10.771,46.482 11.176,46.887 Q1.2@11.176,48.28 ; 11.176,47.807 cw(c11.792,47.807) Q1.2@11.357,48.243
NetQ2_2: Q2.2 R8.2 | length 7.8
  Bottom Layer w0.508: 6.143,44.801 ccw(c7.59,44.801) R8.2@6.567,43.778 ; 6.143,49.26 cw(c6.681,49.26) Q2.2@6.301,49.64 ; Q2.2@6.143,49.804 6.143,44.022 R8.2@6.477,43.688
NetQ2_3: Q2.3 R9.1 | length 2.4
  Bottom Layer w0.508: R9.1@6.938,53.758 cw(c6.564,53.384) 7.093,53.384 ; R9.1@7.028,53.848 7.093,53.783 Q2.3@7.093,52.304 ; 7.093,52.848 ccw(c7.631,52.848) Q2.3@7.251,52.468
NetR11_1: R11.1 U2.6 USB_232.2 | length 8.4
  Top Layer w0.508: USB_232.2@0.4,45.504 2.926,45.504 R11.1@3.98,44.45 4.318,44.45 5.461,43.307 U2.6@6.968,43.307 ; R11.1@3.98,44.323 cw(c3.98,43.2) 4.774,43.994
NetR18_2: R18.2 U4.2 | length 3
  Top Layer w0.508: R18.2@47.677,6.096 U4.2@47.677,9.144
NetR24_1: R24.1 R26.1 USB_HOST1.3 | length 7.5
  Top Layer w0.508: R26.1@67.902,54.61 R24.1@67.902,50.8 68.664,50.038 USB_HOST1.3@71.228,50.038
NetR25_1: R25.1 USB_HOST1.2 | length 3.7
  Top Layer w0.508: R25.1@67.902,48.26 68.742,48.26 69.72,49.238 USB_HOST1.2@71.228,49.238
NetU2_5: U2.5 USB_232.3 | length 11.3
  Top Layer w0.508: USB_232.3@0.4,44.704 v1(2.032,44.704) ; v1(2.032,47.244) 2.964,47.244 5.631,44.577 U2.5@6.968,44.577 ; 5.173,45.035 ccw(c6.168,46.03) U2.5@6.168,44.623
  Bottom Layer w0.508: v1(2.032,44.704) v1(2.032,47.244)
NTRST: R19.2